# Altium PCB PCB.PcbDoc
Units mm, origin at the board's own origin, x right, y up, seen from the top; angles counter-clockwise.
Board outline 152.4 x 101.6 mm, 2 copper layers (Top Layer, Bottom Layer); 15 components, 17 nets, 74 pads, 18 vias.
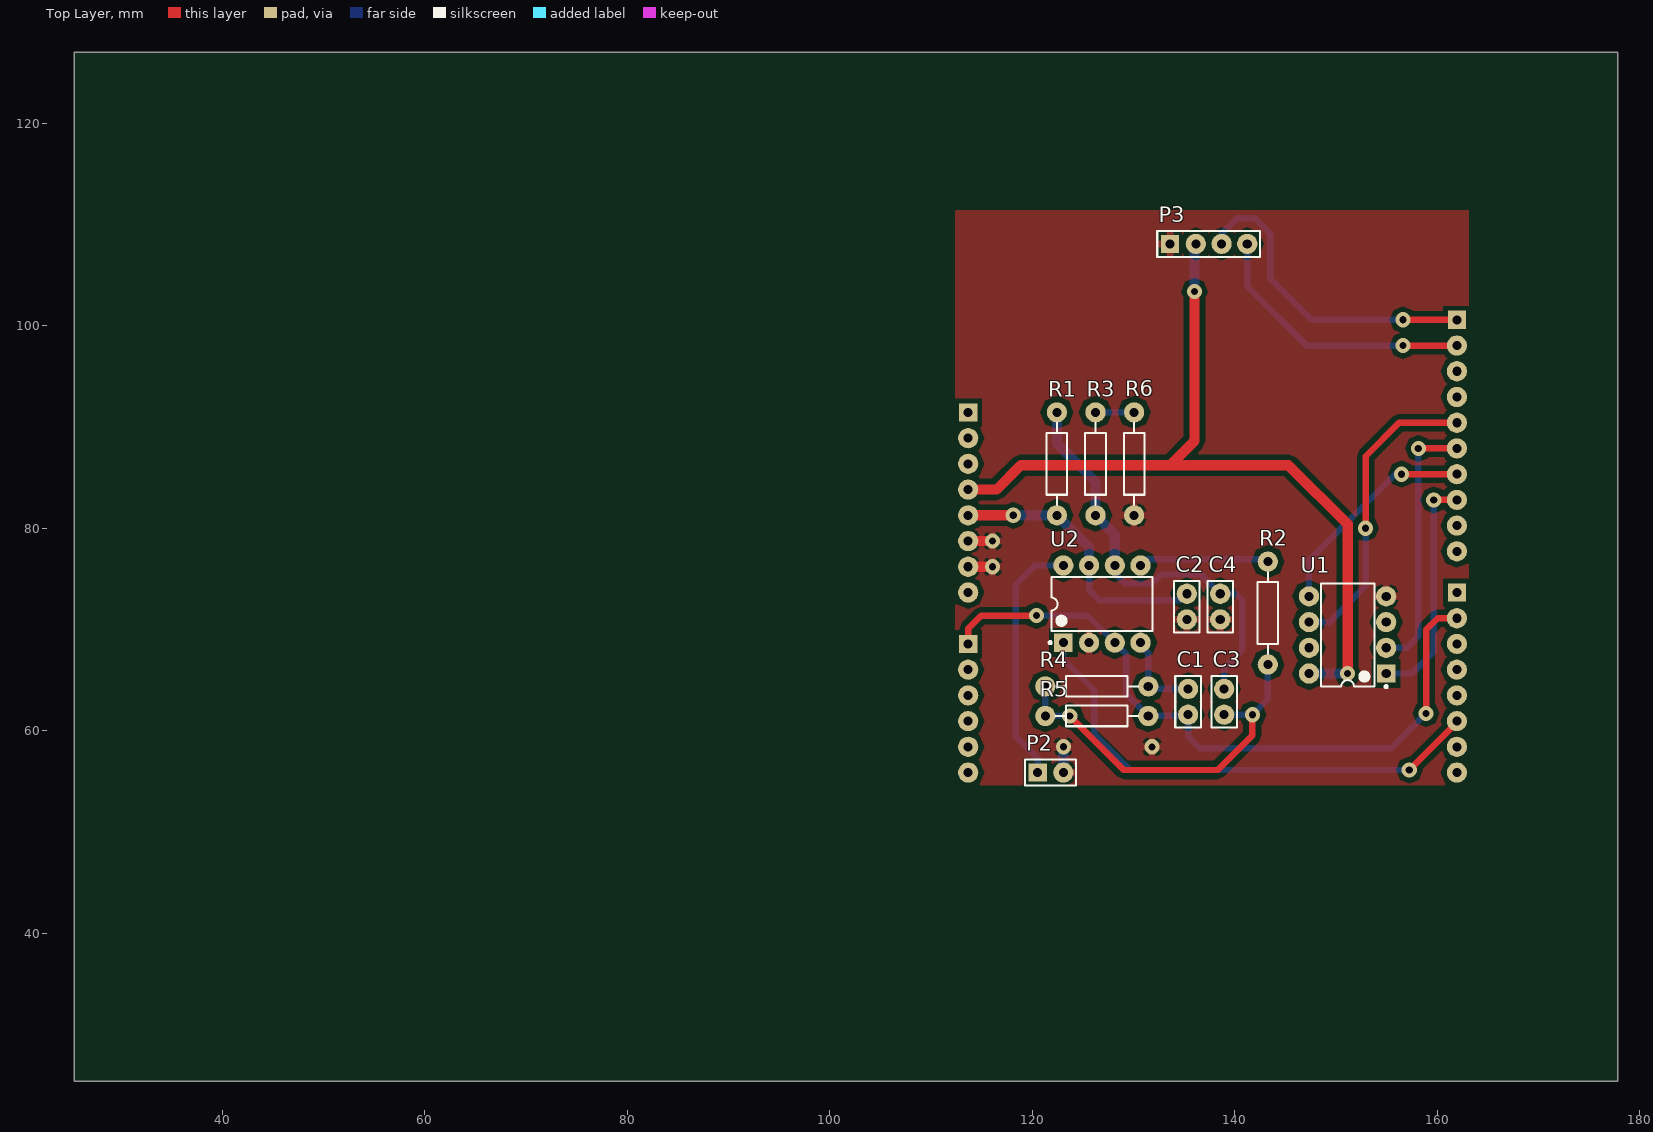
[diagram p0: Top Layer view]
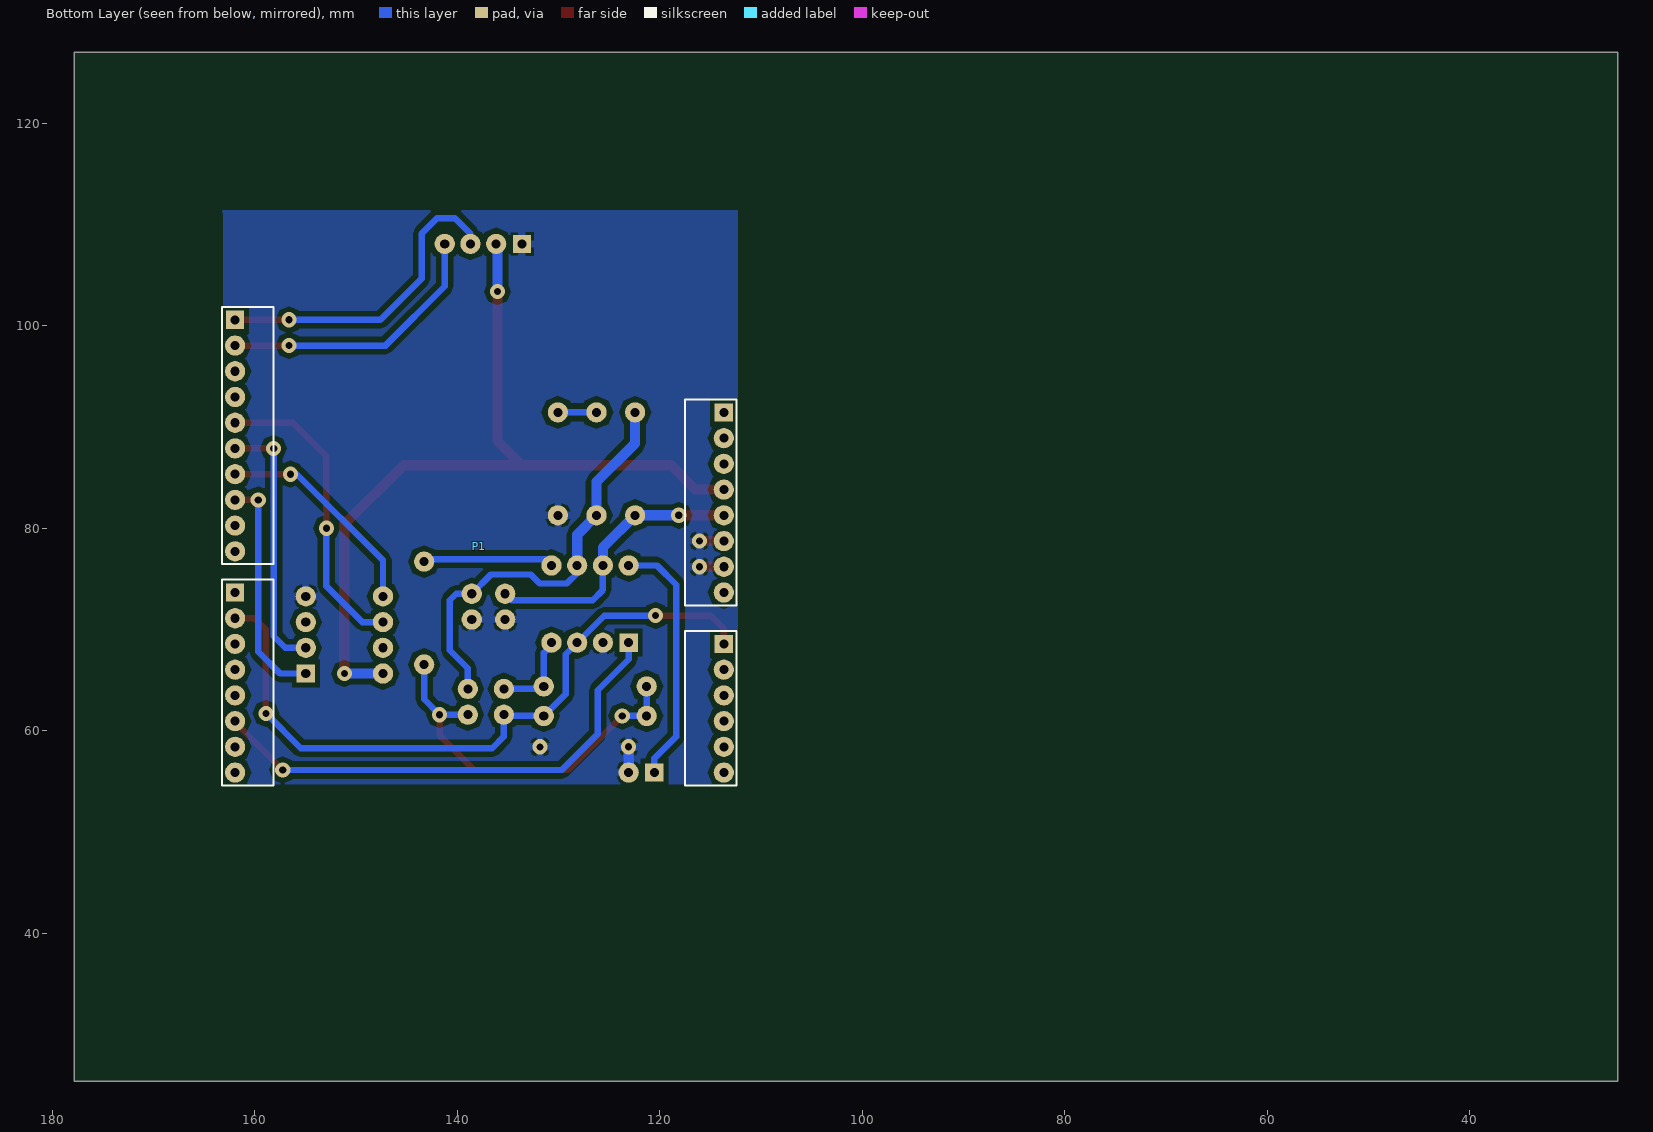
[diagram p1: Bottom Layer view, seen from below]

## Layer stack, top to bottom
Top Solder: solder mask 0.0102, Solder Resist, Dk 3.5
Top Layer: signal copper 0.0356
Dielectric 1: dielectric 0.32, FR-4, Dk 4.8
Bottom Layer: signal copper 0.0356
Bottom Solder: solder mask 0.0102, Solder Resist, Dk 3.5

## Board outline
25.4,25.4 177.8,25.4 177.8,127 25.4,127

## Design rules (kind name [scope] priority, off if disabled: settings)
Clearance [All] p1: gap=0.508 except(0.254: Track-THPad)
ComponentClearance [All] p1: gap=0 collisioncheckmode=3 verticalgap=2540 showdistances=FALSE
PolygonConnect [All] p1: connectstyle=Relief reliefconductorwidth=0.762 reliefentries=4 polygonreliefangle="90 Angle" airgapwidth=0.254
RoomDefinition Schematic [InComponentClass('Schematic')] p1: confinementstyle=ConfineIn formatcopy=TRUE lockcomponents=FALSE outline 111.633,53.975 163.957,53.975 163.957,112.268 111.633,112.268
RoutingVias [All] p1: holewidth=0.711 width=1.27 viastyle="Through Hole" minholewidth=0.711 minwidth=1.27 maxholewidth=0.711 maxwidth=1.27
SolderMaskExpansion [All] p1: expansion=0.102
Width [All] p1: maxlimit=1.016 minlimit=0.381 preferedwidth=0.635
29 further rules are at their usual default settings.

## Components (designator, comment, footprint, x,y, rotation, side; value= is the part's Value field where it differs from the comment)
C1 "Cap" RAD-0.1 135.382,62.865 r270 top
C2 "Cap" RAD-0.1 135.255,72.263 r90 top
C3 "Cap" RAD-0.1 138.938,62.865 r270 top
C4 "Cap" RAD-0.1 138.557,72.263 r90 top
P1 "KL25Z Shield*" "Freedom KL25Z Headerarray" 113.665,55.88 r0 bottom
P2 "Header 2" HDR1X2 120.523,55.88 r0 top
P3 "Header 4" HDR1X4 133.604,108.077 r0 top
R1 "Res2" AXIAL-0.4 122.428,86.36 r270 top
R2 "Res2" AXIAL-0.4 143.256,71.628 r270 top
R3 "Res2" AXIAL-0.4 126.238,86.36 r270 top
R4 "Res2" AXIAL-0.4 126.365,64.389 r0 top
R5 "Res2" AXIAL-0.4 126.365,61.468 r0 top
R6 "Res2" AXIAL-0.4 130.048,86.36 r90 top
U1 "23LCV1024-I/P" MCHP-PDIP-P8 151.13,69.469 r180 top
U2 "MAX295CPA" MAXM-P8-2 126.873,72.517 r90 top

## Footprints (in the part's own frame and the unit in brackets; to place one, negate y for a bottom-side part, rotate by r counter-clockwise, add the part's x,y. Pads: shape width x height; smd on the part's side, far side on the other; paste and mask are expansions set on the pad)
AXIAL-0.4 [mm] "Axial Device, Thru-Hole; 2 Leads; 0.4 in Pin Spacing"
  round 2 hole 0.9: 1(-5.08,0) 2(5.08,0)
  silkscreen extent -4.06,-1.02 4.06,1.02
"Freedom KL25Z Headerarray" [mm] "Headerarray KL25Z Shield"
  rect 1.8x1.8 hole 0.9: 1(0,-35.56) 17(0,-12.7) 30(48.26,-44.704) 50(48.26,-17.78)
  round 2 hole 0.9: 3(0,-33.02) 5(0,-30.48) 7(0,-27.94) 9(0,-25.4) 11(0,-22.86) 13(0,-20.32) 15(0,-17.78) 19(0,-10.16) 21(0,-7.62) 23(0,-5.08) 25(0,-2.54) 27(0,0) 32(48.26,-42.164) 34(48.26,-39.624) 36(48.26,-37.084) 38(48.26,-34.544) 40(48.26,-32.004) 42(48.26,-29.464) 44(48.26,-26.924) 46(48.26,-24.384) 48(48.26,-21.844) 52(48.26,-15.24) 54(48.26,-12.7) 56(48.26,-10.16) 58(48.26,-7.62) 60(48.26,-5.08) 62(48.26,-2.54) 64(48.26,0)
  silkscreen extent -1.27,-45.97 49.53,1.27
HDR1X2 [mm] "Connector; Header; 2 Position"
  rect 1.8x1.8 hole 0.9: 1(0,0)
  round 2 hole 0.9: 2(2.54,0)
  silkscreen extent -1.27,-1.27 3.81,1.27
HDR1X4 [mm] "Connector; Header; 4 Position"
  rect 1.8x1.8 hole 0.9: 1(0,0)
  round 2 hole 0.9: 2(2.54,0) 3(5.08,0) 4(7.62,0)
  silkscreen extent -1.27,-1.27 8.89,1.27
MAXM-P8-2 [mm] "DIP, 8-Leads, Body 9.375x6.985mm, Pitch 2.54mm"
  rect 1.8x1.8 hole 0.9: 1(-3.81,3.81)
  round 2 hole 0.9: 2(-3.81,1.27) 3(-3.81,-1.27) 4(-3.81,-3.81) 5(3.81,-3.81) 6(3.81,-1.27) 7(3.81,1.27) 8(3.81,3.81)
  silkscreen extent -3.93,-5 2.65,5.23, body extent -3.95,-4.95 3.95,4.95, height 4.58
MCHP-PDIP-P8 [mm] "PDIP, 8-Leads, Body 9.5x6.604mm, Pitch 2.54mm"
  rect 1.8x1.8 hole 0.9: 1(-3.81,3.81)
  round 2 hole 0.9: 2(-3.81,1.27) 3(-3.81,-1.27) 4(-3.81,-3.81) 5(3.81,-3.81) 6(3.81,-1.27) 7(3.81,1.27) 8(3.81,3.81)
  silkscreen extent -3.94,-5.1 2.65,5.23, body extent -3.95,-5.07 3.95,5.07, height 5.34
RAD-0.1 [mm] "Radial Cap, Thru-Hole; 2 Leads; 0.1 in Pin Spacing"
  round 2 hole 0.9: 1(-1.27,0) 2(1.27,0)
  silkscreen extent -2.54,-1.27 2.54,1.27

## Part data
C1 C2 C3 C4: "Capacitor"
P1: library part "Freedom KL25Z Header", "FRDM KL25Z Shield"
P2: "Header, 2-Pin"
P3: "Header, 4-Pin"
R1 R2 R3 R4 R5 R6: "Resistor"
U1: "1024K bits SPI Serial SRAM with Battery Backup and SDI Interface, 2.5 to 5.5 V, 20 MHz, -40 to 85 degC, 8-pin PDIP (P8), Tube"
U2: "8th-Order Switched Capacitor Lowpass Filter, Butterworth, Clock Tunable, 0 to 70 degC, 8-Pin DIP (P8-2)"

## Via types
v1: diameter 1.5, hole 0.711, Top Layer to Bottom Layer, tented both sides, 17 vias
v2: diameter 1.5, hole 0.7, Top Layer to Bottom Layer, tented both sides, 1 vias

## Nets (pads, with @x,y where several pads share a name; then routed paths per layer and width w, separated by ;. In a path a pad name is that pad's centre, name@x,y a point inside that pad or via, vN(x,y) a via of type N, cw(c..) or ccw(c..) an arc to the next point about the centre after c; other vN are vias at no path point)
2ND_STG: R2.1 U2.5 | length 12.6
  Bottom Layer w0.635: U2.5 131.318,76.962 R2.1@143.002,76.962
3V3: P1.7 P3.2 U1.8 | length 82.1
  Top Layer w1.016: P1.7 116.459,83.82 118.872,86.233 133.604,86.233 ; v1(136.017,103.378) 136.017,88.646 133.604,86.233 ; v1(151.13,65.659) 151.13,80.391 145.288,86.233 133.604,86.233
  Bottom Layer w1.016: v1(136.017,103.378) P3.2@136.017,107.95 ; U1.8 v1(151.13,65.659)
5V0: C2.2 P1.9 R1.2 U2.7 | length 27.8
  Top Layer w1.016: P1.9 v1(118.11,81.28)
  Bottom Layer w0.635: U2.7 125.603,73.914 126.619,72.898 134.62,72.898 C2.2
  Bottom Layer w1.016: v1(118.11,81.28) R1.2 125.603,78.105 U2.7
\C\S\: P1.44 U1.1 | length 22.9
  Top Layer w0.635: v1(159.639,82.804) P1.44
  Bottom Layer w0.635: U1.1 157.48,65.659 159.639,67.818 v1(159.639,82.804)
FILTER_CLK: P1.60 U2.1 | length 49.6
  Top Layer w0.635: v1(157.226,56.134) 161.925,60.833 P1.60
  Bottom Layer w0.635: U2.1 123.063,67.056 126.111,64.008 126.111,59.69 129.667,56.134 v1(157.226,56.134)
FILTER_GND: C3.1 C4.2 R1.1 R3.2 U2.6 | length 42.2
  Bottom Layer w0.635: U2.6 128.143,75.565 129.159,74.549 131.826,74.549 132.715,75.438 136.652,75.438 C4.2 140.081,73.533 140.716,72.898 140.716,67.945 138.938,66.167 C3.1
  Bottom Layer w1.016: R1.1 122.428,88.392 126.238,84.582 R3.2 128.143,79.375 U2.6
FILTER_IN: P2.1 U2.8 | length 24.9
  Bottom Layer w0.635: P2.1 120.523,57.277 118.364,59.436 118.364,74.422 120.269,76.327 U2.8
FILTER_OUT: C1.2 P1.17 P1.52 R5.2 U2.3 | length 69.4
  Top Layer w0.635: P1.17 113.665,70.104 114.935,71.374 v1(120.396,71.374) ; v1(158.877,61.722) 158.877,69.977 160.02,71.12 P1.52
  Bottom Layer w0.635: v1(120.396,71.374) 125.476,71.374 U2.3 129.286,67.564 129.286,63.627 R5.2 C1.2@135.255,61.468 ; C1.2 135.382,59.436 136.525,58.293 155.448,58.293 v1(158.877,61.722)
GND: C2.1 C4.1 P1.11 P1.13 P2.2 P3.1 R6.1 U1.4 U2.2 | length 7.4
  Top Layer w1.016: P1.13 v1(116.078,76.2) ; P1.11 v1(116.078,78.74)
  Bottom Layer w1.016: P2.2 v1(123.063,58.42)
  other v2: 131.826,58.42
MISO: P1.40 U1.2 | length 26
  Top Layer w0.635: v1(158.115,87.884) P1.40
  Bottom Layer w0.635: U1.2 156.972,68.199 158.115,69.342 v1(158.115,87.884)
MOSI: P1.42 U1.5 | length 21.7
  Top Layer w0.635: v1(156.464,85.344) P1.42
  Bottom Layer w0.635: U1.5 147.32,76.835 155.829,85.344 v1(156.464,85.344)
NetC3_2: C3.2 R2.2 R4.1 R5.1 | length 37.4
  Top Layer w0.635: v1(123.698,61.468) 129.032,56.134 138.303,56.134 141.732,59.563 v1(141.732,61.595)
  Bottom Layer w0.635: R4.1 R5.1 v1(123.698,61.468) ; C3.2 v1(141.732,61.595) 143.256,63.119 R2.2
NetR3_1: R3.1 R6.2 | length 3.8
  Bottom Layer w0.635: R3.1 R6.2
OP_IN-: C1.1 R4.2 U2.4 | length 8.4
  Bottom Layer w0.635: U2.4@130.683,68.453 131.445,67.691 R4.2 131.699,64.135 C1.1
SCK: P1.38 U1.6 | length 30.3
  Top Layer w0.635: v1(152.908,80.01) 152.908,87.122 156.21,90.424 P1.38
  Bottom Layer w0.635: U1.6 149.352,70.739 152.908,74.295 v1(152.908,80.01)
SCL: P1.30 P3.3 | length 31.6
  Top Layer w0.635: v1(156.591,100.584) P1.30
  Bottom Layer w0.635: P3.3 138.684,109.093 140.208,110.617 141.986,110.617 143.51,109.093 143.51,104.648 147.574,100.584 v1(156.591,100.584)
SDA: P1.32 P3.4 | length 27.2
  Top Layer w0.635: v1(156.591,98.044) P1.32@161.671,98.044
  Top Layer w0.762: P1.32@161.798,98.171 P1.32
  Bottom Layer w0.635: P3.4 141.224,103.886 147.066,98.044 v1(156.591,98.044)
pads on no net: P1.1 P1.3 P1.5 P1.15 P1.19 P1.21 P1.23 P1.25 P1.27 P1.34 P1.36 P1.46 P1.48 P1.50 P1.54 P1.56 P1.58 P1.62 P1.64 U1.3 U1.7

## Polygon pours and split planes (outlines as drawn)
GND on Bottom Layer "GNDpoly" (solid, pour order 0): 112.395,54.737 163.068,54.737 163.068,111.125 163.322,111.379 112.268,111.379 112.268,54.737 112.395,54.61
GND on Top Layer "GNDpolyTop" (solid, pour order 2): 112.268,111.379 112.395,111.252 112.395,54.61 163.195,54.61 163.068,54.737 163.068,111.379 112.268,111.379